# Altium PCB PCB3.PcbDoc
Units mil, origin at the board's own origin, x right, y up, seen from the top; angles counter-clockwise.
Board outline 1392 x 956 mil, 2 copper layers (Top Layer, Bottom Layer); 52 components, 58 nets, 232 pads, 145 vias.
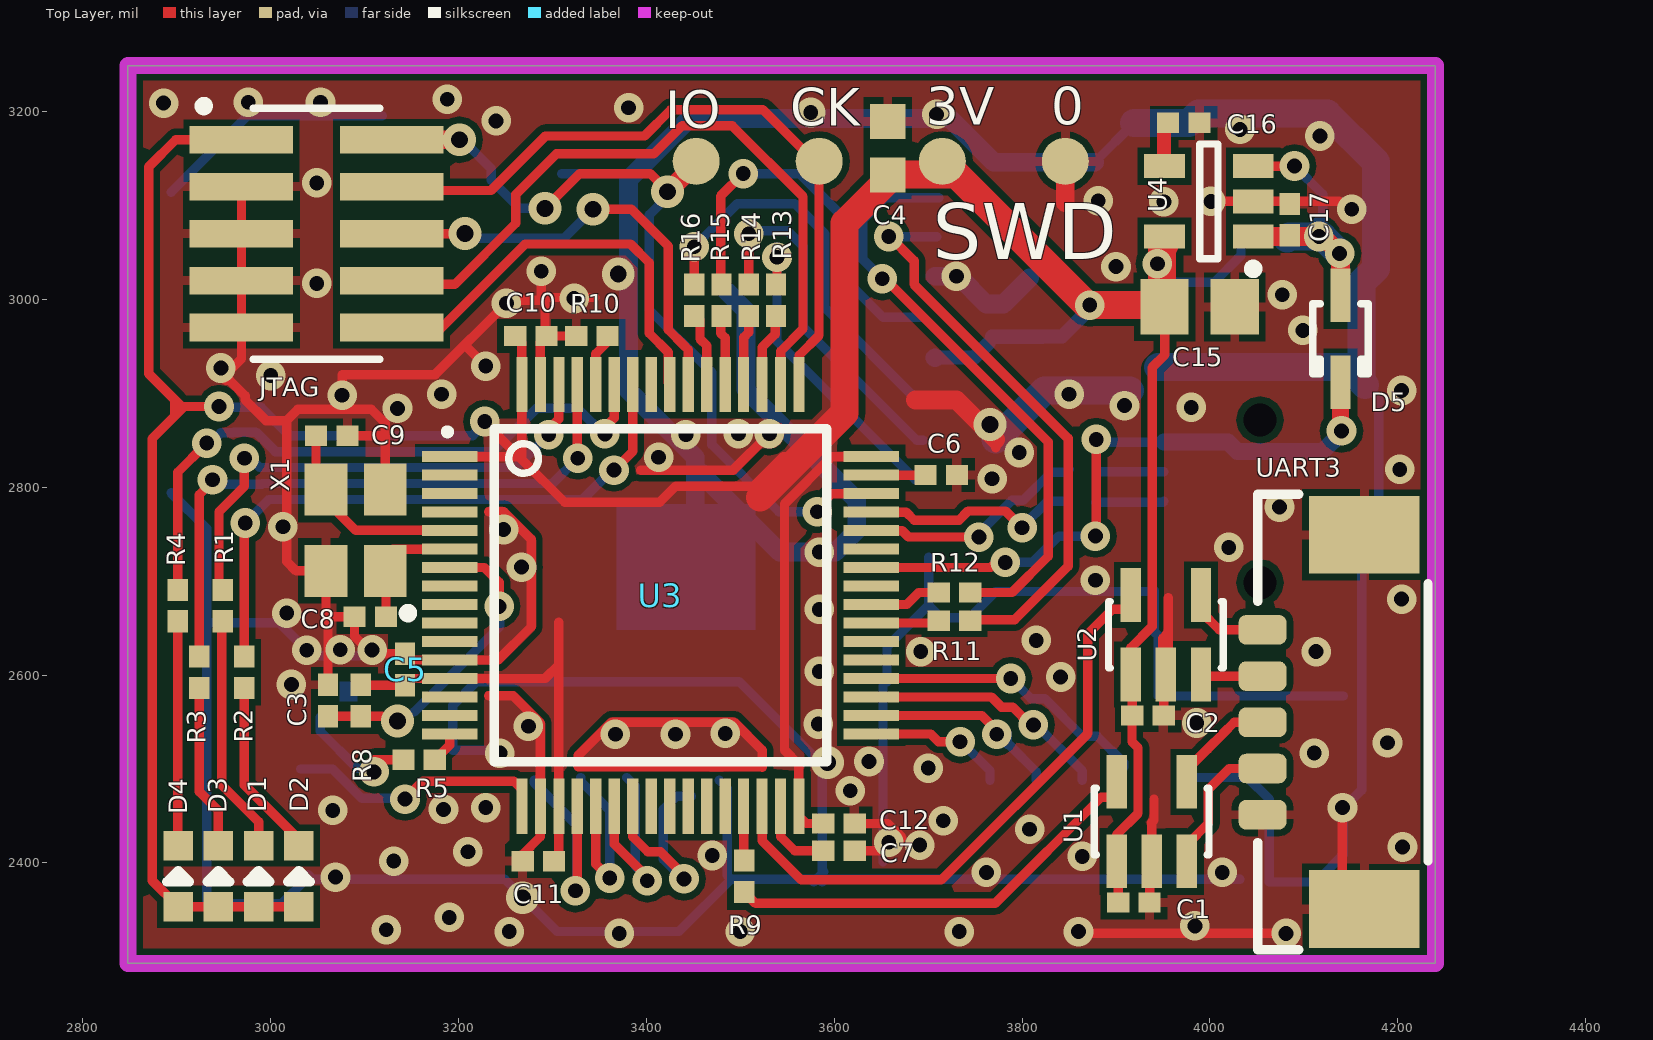
[diagram p0: Top Layer view]
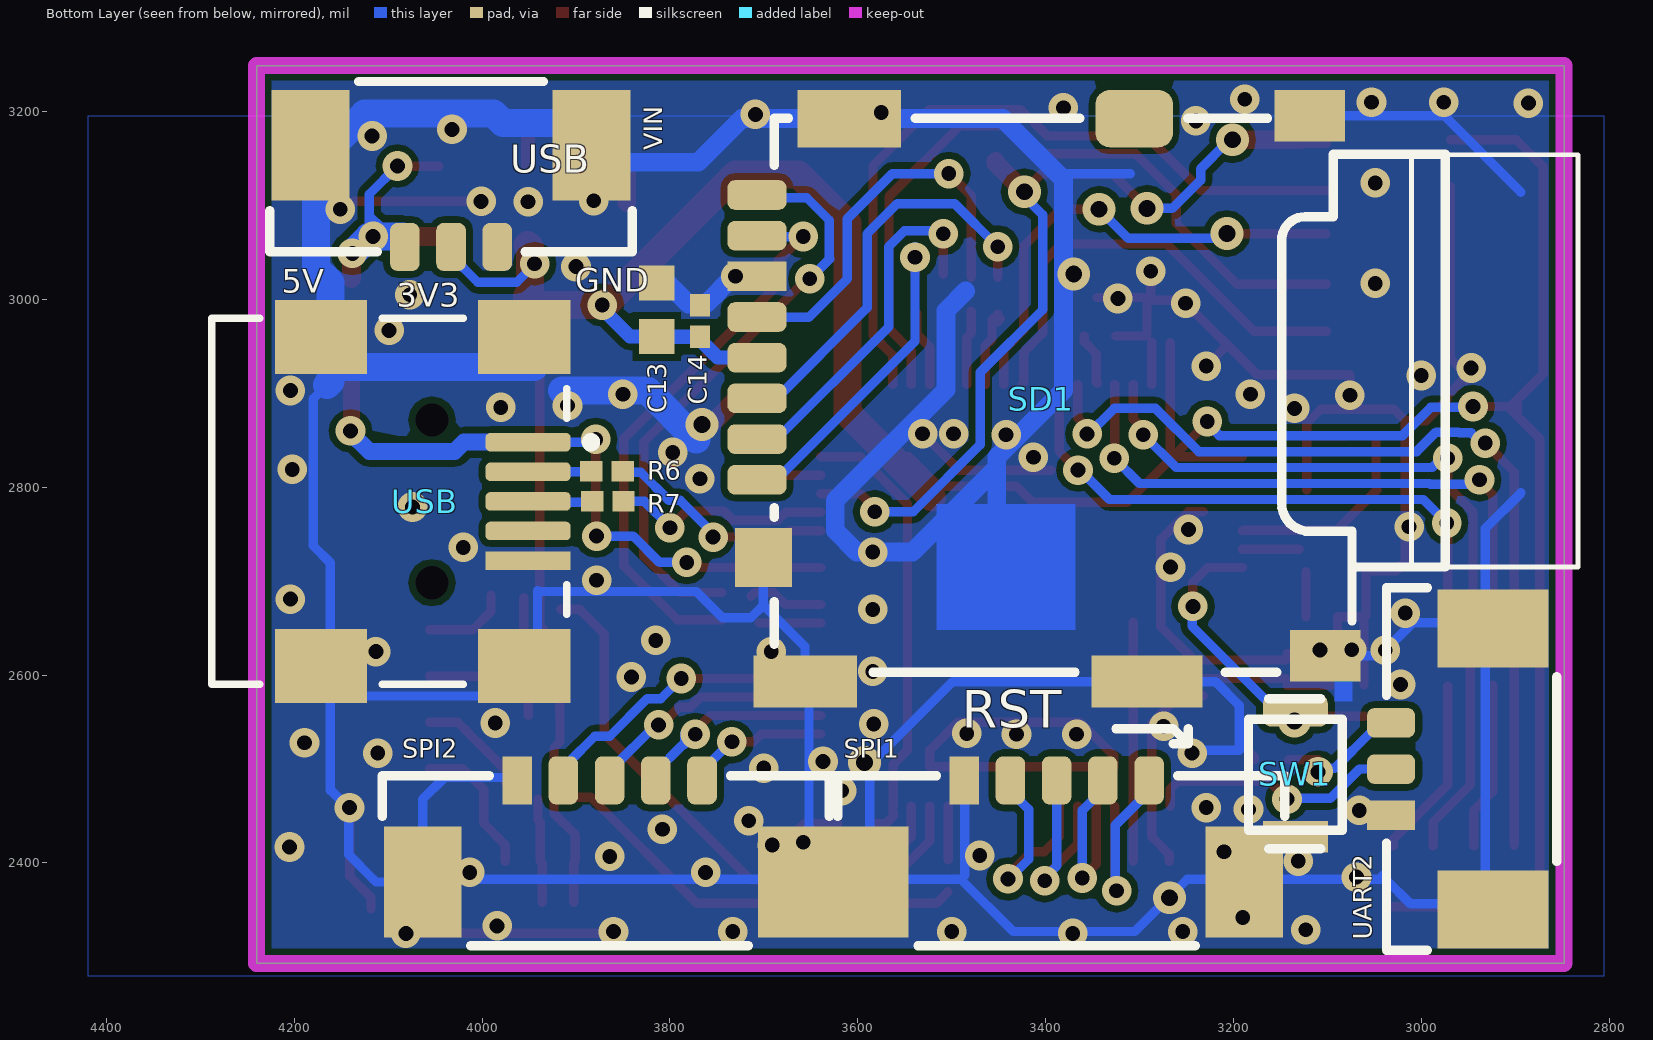
[diagram p1: Bottom Layer view, seen from below]

## Layer stack, top to bottom
Top Layer: signal copper 1.4
Dielectric: dielectric 12.6, FR-4, Dk 4.8
Bottom Layer: signal copper 1.4

## Board outline
2848,2293 4240,2293 4240,3249 2848,3249

## Design rules (kind name [scope] priority, off if disabled: settings)
Clearance [All] p1: gap=7
ComponentClearance [All] p1 off: gap=2 collisioncheckmode=3 verticalgap=10 showdistances=FALSE
DiffPairsRouting [All] p1: maxlimit=10 minlimit=10 mostfreqgap=10 maxuncoupledlength=500
MinimumSolderMaskSliver [All] p1 off: minsoldermaskwidth=10
PlaneConnect PlaneConnect_1 [IsVia] p1: planeconnectstyle=Direct reliefexpansion=20 reliefentries=4 reliefconductorwidth=10 reliefairgap=10
PlaneConnect [All] p2: planeconnectstyle=Relief reliefexpansion=20 reliefentries=4 reliefconductorwidth=10 reliefairgap=10
PolygonConnect PolygonConnect_1 [IsVia or IsNamedPolygon('CriticalGnd')] p1: connectstyle=Direct reliefconductorwidth=10 reliefentries=4 polygonreliefangle="90 Angle"
PolygonConnect [All] p2: connectstyle=Relief reliefconductorwidth=10 reliefentries=4 polygonreliefangle="90 Angle"
RoomDefinition Connectors [InComponentClass('Connectors')] p1: confinementstyle=ConfineIn formatcopy=TRUE lockcomponents=FALSE outline 2849,2293 4294,2293 4294,3249 2849,3249
RoomDefinition Power [InComponentClass('Power')] p2: confinementstyle=ConfineIn formatcopy=TRUE lockcomponents=FALSE outline 4124,3349 3916,3349 3916,2948 4124,2948
RoomDefinition LedsAndBtns [InComponentClass('LedsAndBtns')] p3: confinementstyle=ConfineIn formatcopy=TRUE lockcomponents=FALSE outline 3271,2740 3271,2322 2874,2322 2874,2740
RoomDefinition SD [InComponentClass('SD')] p4: confinementstyle=ConfineIn formatcopy=TRUE lockcomponents=FALSE outline 3852,2551 3852,3233 2818,3233 2818,2551
RoomDefinition MCU [InComponentClass('MCU')] p5: confinementstyle=ConfineIn formatcopy=TRUE lockcomponents=FALSE outline 3016,2336 4194,2336 4194,3302 3016,3302
RoutingVias [All] p1: holewidth=18 width=35 viastyle="Through Hole" minholewidth=15.75 minwidth=31.5 maxholewidth=28 maxwidth=50
SilkToSilkClearance [All] p1 off: silktosilkclearance=10
SilkscreenOverComponentPads [All] p1 off: minsilkscreentomaskgap=10
SolderMaskExpansion SolderMaskExpansion_1 [IsVia] p1: expansion=-78.74
SolderMaskExpansion [All] p2: expansion=4
TestPointUsage FabricationTestPointUsage [All] p1: valid=0 allowmultiple=FALSE
Testpoint FabricationTestpoint [(IsPad And (OnTopLayer Or OnBottomLayer))] p1: side=3 testpointundercomponent=TRUE minsize=40 maxsize=100 preferedsize=60 minholesize=0 maxholesize=40 preferedholesize=32 testpointgrid=1 style=297 order=0-112345678
Width [All] p1: maxlimit=30 minlimit=10 preferedwidth=10 minimp=50.000000 maximp=50.000000 favimp=50.000000
18 further rules are at their usual default settings.

## Classes and differential pairs
component class Power: C15 C16 C17 U4
net class SD_D[0..3]: SD_D0 SD_D1 SD_D2 SD_D3
component class SD: C13 C14 SD1
component class MCU: C3 C4 C5 C6 C7 C8 C9 C10 C11 C12 D5 R5 R6 R7 R8 R9 R10 R11 R12 R13 R14 R15 R16 U3 X1 Y1
component class LedsAndBtns: D1 D2 D3 D4 R1 R2 R3 R4 SW1
component class Connectors: C1 C2 JTAG SPI1 SPI2 U1 U2 UART2 UART3 USB VIN
differential pair LVDS_UART_OUT: +LVDS_UART_OUT_P -LVDS_UART_OUT_N
differential pair LVDS_UART_IN: +LVDS_UART_IN_P -LVDS_UART_IN_N
differential pair USB: +USB_P -USB_N

## Components (designator, comment, footprint, x,y, rotation, side; value= is the part's Value field where it differs from the comment)
C1 "Cap" V0402 3919,2358 r180 top
C2 "Cap" V0402 3934,2557 r180 top
C3 "Cap" V0402 3061,2573 r270 top
C4 "Cap" V0603 3657,3161 r90 top
C5 "Cap" V0402 3143,2606 r270 top
C6 "Cap" V0402 3714,2813 r180 top
C7 "Cap" V0402 3605,2413 r180 top
C8 "Cap" V0402 3106,2662 r0 top
C9 "Cap" V0402 3065,2855 r0 top
C10 "Cap" V0402 3277,2961 r180 top
C11 "Cap" V0402 3285,2402 r0 top
C12 "Cap" V0402 3605,2442 r180 top
C13 "Cap" V0603 3814,2989 r90 bottom
C14 "Cap" V0402 3768,2977 r90 bottom
C15 "TAJR475K006RNJ" 0805 3989,2992 r0 top
C16 "Cap" V0402 3972,3188 r0 top
C17 "Cap" V0402 4085,3085 r270 top
D1 "BLUE" KP-1608SURC_R 2987.17,2386 r90 top
D2 "RED" KP-1608SURC_B 3030,2386 r90 top
D3 "GREEN" KP-1608SURC_Y 2944.33,2386 r90 top
D4 "YELLOW" KP-1608SURC_G 2901.5,2386 r90 top
D5 "D Schottky" SOD-323 4139,2958 r270 top
JTAG "dual-row 10 pin connector" FTSH-105-01-L-DV-K-TR 3048.8,3070 r90 top
R1 "Res3" V0402RES 2949,2674 r270 top
R2 "Res3" V0402RES 2972,2603 r270 top
R3 "Res3" V0402RES 2924,2603 r270 top
R4 "Res3" V0402RES 2901,2674 r270 top
R5 "Res3" V0402RES 3158,2510 r180 top
R6 "Res3" V0402RES 3867,2817 r0 bottom
R7 "Res3" V0402RES 3866,2785 r0 bottom
R8 "Res3" V0402RES 3096,2573 r90 top
R9 "Res3" V0402RES 3504,2386 r270 top
R10 "Res3" V0402RES 3342,2961 r0 top
R11 "Place close to MCU" V0402RES 3728,2658 r180 top
R12 "Place close to MCU" V0402RES 3728,2688 r180 top
R13 "Place close to MCU" V0402RES 3538,2999 r270 top
R14 "Place close to MCU" V0402RES 3509,2999 r270 top
R15 "Place close to MCU" V0402RES 3480,2999 r270 top
R16 "Place close to MCU" V0402RES 3451,2999 r270 top
SD1 "SD Slot" MICROSD-card 3065,2934 r90 bottom
SPI1 "0533980571" "5 pins picoblade 1,25 mm pitch, right-angle SMT - duplicate"#1 3339,2489 r180 bottom
SPI2 "0533980571" "5 pins picoblade 1,25 mm pitch, right-angle SMT - duplicate"#1 3815,2489 r180 bottom
SW1 "Tactile OMRON B3U-1000P" TACTILE-B3U-1000P 3134,2495 r270 bottom
U1 "LVDS DRVR FIN1001M5X" SOT-23-5 3938,2444 r0 top
U2 "LVDS RECVR FIN1002M5X" SOT-23-5 3953,2643 r0 top
U3 "STM32F40x-RG_Dirk" LQFP64 3415,2685 r0 top
U4 "LP2992AIM5-3.3" MF05A_N 3998.76,3104.4 r180 top
UART2 "53398-0371" "3 pins picoblade 1,25 mm pitch, right-angle SMT"#1 2978,2500 r90 bottom
UART3 "0533980571" "5 pins picoblade 1,25 mm pitch, right-angle SMT - duplicate"#2 4055,2599 r90 top
USB "0481900001" USB/SM0.8-6H5 4260,2785 r0 bottom
VIN "53398-0371" "3 pins picoblade 1,25 mm pitch, right-angle SMT"#2 4033,3110 r0 bottom
X1 "3SMXB" CFPX-5 3090.38,2754.25 r90 top

## Footprints (in the part's own frame and the unit in brackets; to place one, negate y for a bottom-side part, rotate by r counter-clockwise, add the part's x,y. Pads: shape width x height; smd on the part's side, far side on the other; paste and mask are expansions set on the pad)
"3 pins picoblade 1,25 mm pitch, right-angle SMT"#1 [mm]
  rect 2.1x3 smd: 1(-3.8,-1.375) 1(3.8,-1.375)
  rect 0.8x1.3 smd: 1(-1.25,1.375)
  rrect50% 0.8x1.3 smd: 2(0,1.375) 3(1.25,1.375)
  silkscreen extent -4.9,-3.1 4.9,1.5, body extent -4.45,-2.6 4.45,1.6, height 4.69
"3 pins picoblade 1,25 mm pitch, right-angle SMT"#2 [mm]
  rect 2.1x3 smd: 1(-3.8,-1.375) 1(3.8,-1.375)
  rrect50% 0.8x1.3 smd: 1(-1.25,1.375) 2(0,1.375) 3(1.25,1.375)
  silkscreen extent -4.9,-3.1 4.9,1.5, body extent -4.45,-2.6 4.45,1.6, height 4.69
"5 pins picoblade 1,25 mm pitch, right-angle SMT - duplicate"#1 [mm]
  rect 2.1x3 smd: 1(-6.3,-2.775) 1(3.82,-2.775)
  rect 0.8x1.3 smd: 1(-3.75,-0.025)
  rrect50% 0.8x1.3 smd: 2(-2.5,-0.025) 3(-1.25,-0.025) 4(0,-0.025) 5(1.25,-0.025)
  silkscreen extent -7.4,-4.5 4.92,0.1, body extent -6.95,-4.35 4.45,-0.15, height 4.69
"5 pins picoblade 1,25 mm pitch, right-angle SMT - duplicate"#2 [mm]
  rect 2.1x3 smd: 1(-6.3,-2.775) 1(3.82,-2.775)
  rrect50% 0.8x1.3 smd: 1(-3.75,-0.025) 2(-2.5,-0.025) 3(-1.25,-0.025) 4(0,-0.025) 5(1.25,-0.025)
  silkscreen extent -7.4,-4.5 4.92,0.1, body extent -6.95,-4.35 4.45,-0.15, height 4.69
0805 [mm] "Chip Capacitor; Body 2.0 x 1.2 mm (LxW typ)"
  rect 1.3x1.5 smd: 1(-0.95,0) 2(0.95,0)
  body extent -1.3,-0.66 1.32,0.66, height 0.8
CFPX-5 [mm] "Quartz Crystal, SM; Body 3.4 x 2.7 mm (LxW max)"
  rect 1.4x1.15 smd: 1(-1.1,-0.8) 2(1.1,-0.8) 3(1.1,0.8) 4(-1.1,0.8)
  silkscreen extent -2.37,-1.54 -2.12,-1.29, body extent -1.9,-1.48 1.9,1.48, height 1
FTSH-105-01-L-DV-K-TR [mm] "1.27mm pitch, 10 pin, terminal strip; keyed"
  rect 0.75x2.8 smd mask+0: 1(2.54,2.03) 2(2.54,-2.03) 3(1.27,2.03) 4(1.27,-2.03) 5(0,2.03) 6(0,-2.03) 7(-1.27,2.03) 8(-1.27,-2.03) 9(-2.54,2.03) 10(-2.54,-2.03)
  silkscreen extent -3.39,-1.72 3.57,3.17, body extent -3.17,-3.17 3.18,2.67, height 6.08
KP-1608SURC_B [mm]
  rect 0.8x0.8 smd: 1(-0.825,0) 2(0.825,0)
  silkscreen extent -0.15,-0.3 0.15,0.3, body extent -0.81,-0.41 0.79,0.38, height 1
KP-1608SURC_G [mm]
  rect 0.8x0.8 smd: 1(-0.825,0) 2(0.825,0)
  silkscreen extent -0.15,-0.3 0.15,0.3, body extent -0.81,-0.41 0.79,0.38, height 1
KP-1608SURC_R [mm]
  rect 0.8x0.8 smd: 1(-0.825,0) 2(0.825,0)
  silkscreen extent -0.15,-0.3 0.15,0.3, body extent -0.81,-0.41 0.79,0.38, height 1
KP-1608SURC_Y [mm]
  rect 0.8x0.8 smd: 1(-0.825,0) 2(0.825,0)
  silkscreen extent -0.15,-0.3 0.15,0.3, body extent -0.81,-0.41 0.79,0.38, height 1
LQFP64 [mm]
  rect 1.5x0.3 smd: 1(-5.7,3.75) 2(-5.7,3.25) 3(-5.7,2.75) 4(-5.7,2.25) 5(-5.7,1.75) 6(-5.7,1.25) 7(-5.7,0.75) 8(-5.7,0.25) 9(-5.7,-0.25) 10(-5.7,-0.75) 11(-5.7,-1.25) 12(-5.7,-1.75) 13(-5.7,-2.25) 14(-5.7,-2.75) 15(-5.7,-3.25) 16(-5.7,-3.75) 33(5.7,-3.75) 34(5.7,-3.25) 35(5.7,-2.75) 36(5.7,-2.25) 37(5.7,-1.75) 38(5.7,-1.25) 39(5.7,-0.75) 40(5.7,-0.25) 41(5.7,0.25) 42(5.7,0.75) 43(5.7,1.25) 44(5.7,1.75) 45(5.7,2.25) 46(5.7,2.75) 47(5.7,3.25) 48(5.7,3.75)
  rect 0.3x1.5 smd: 17(-3.75,-5.7) 18(-3.25,-5.7) 19(-2.75,-5.7) 20(-2.25,-5.7) 21(-1.75,-5.7) 22(-1.25,-5.7) 23(-0.75,-5.7) 24(-0.25,-5.7) 25(0.25,-5.7) 26(0.75,-5.7) 27(1.25,-5.7) 28(1.75,-5.7) 29(2.25,-5.7) 30(2.75,-5.7) 31(3.25,-5.7) 32(3.75,-5.7) 49(3.75,5.7) 50(3.25,5.7) 51(2.75,5.7) 52(2.25,5.7) 53(1.75,5.7) 54(1.25,5.7) 55(0.75,5.7) 56(0.25,5.7) 57(-0.25,5.7) 58(-0.75,5.7) 59(-1.25,5.7) 60(-1.75,5.7) 61(-2.25,5.7) 62(-2.75,5.7) 63(-3.25,5.7) 64(-3.75,5.7)
  silkscreen extent -5.84,-4.5 4.5,4.5, body extent -4.5,-4.5 4.5,4.5, height 2.54
MF05A_N [mm] "SOT23, 5-Leads, Body 2.9x1.6mm, Pitch 0.95mm, Lead Span 2.8mm, IPC Medium Density"
  rect 1.1x0.65 smd: 1(-1.2,0.95) 2(-1.2,0) 3(-1.2,-0.95) 4(1.2,-0.95) 5(1.2,0.95)
  silkscreen extent -1.33,-1.55 0.25,1.95, body extent -0.9,-1.55 0.9,1.55, height 1.19
MICROSD-card [mm]
  rrect50% 1.55x2.1 smd: CD(6.566,6.114)
  rrect50% 0.8x1.6 smd: CD/DAT3(-2.099,16.314) CLK(1.201,16.314) CMD(-0.999,16.314) DAT0(3.401,16.314) DAT1(4.501,16.314) DAT2(-3.199,16.314) VCC(0.101,16.314)
  rect 1.6x1.55 smd: GND(-5.299,16.139)
  rect 0.8x1.6 smd: GND(2.301,16.314)
  rect 1.4x3 smd: HOUSING(-8.659,5.764)
  rect 1.4x2.8 smd: HOUSING(-8.659,15.014)
  rect 1.4x1.9 smd: HOUSING(-7.959,0.95) HOUSING(6.641,1.364)
  rect 1.55x2.8 smd: HOUSING(6.566,13.814)
  silkscreen extent -8.41,-5.89 6.58,15.84, body extent -8.41,-2.29 6.58,15.84, height 1.95
SOD-323 [mm] "SOD-323/SC-76; 2 Leads; Body 1.7 x 1.3 mm, (LxW)"
  rect 1.45x0.55 smd: 1(1.175,0) 2(-1.175,0)
  silkscreen extent -0.95,-0.75 0.95,0.75, body extent -1.05,-0.85 1.05,0.85, height 1.1
SOT-23-5 [mm] "SOT-23/SC-74A; 5 Leads; Body 3 x 3.1 mm, inc. leads (LxW max)"
  rect 0.55x1.45 smd: 1(-0.95,-1.075) 2(0,-1.075) 3(0.95,-1.075) 4(0.95,1.075) 5(-0.95,1.075)
  silkscreen extent -1.55,-0.9 1.55,0.9, body extent -1.65,-1 1.65,1, height 1.45
TACTILE-B3U-1000P [mm]
  rrect50% 0.85x1.75 smd paste+0.1: 1(-1.7,0)
  rect 0.85x1.75 smd paste+0.1: 2(1.7,0)
  silkscreen extent -2.03,-1.27 2.03,1.27, body extent -2,-1.27 2,1.23, height 1.6
USB/SM0.8-6H5 [mm] "Connector; USB2.0, Type B, SM; 5 Position; Right Angle"
  rrect50% 2.3x0.5 smd: 1(-7.85,-1.6) 2(-7.85,-0.8) 3(-7.85,0) 4(-7.85,0.8)
  rect 2.3x0.5 smd: 5(-7.85,1.6)
  round 0.6 hole 0.9 unplated: MH1(-5.25,2.2) MH2(-5.25,-2.2)
  rect 2.5x2 smd: MH3(-7.75,-4.45) MH3(-2.25,-4.45) MH4(-7.75,4.45) MH4(-2.25,4.45)
  silkscreen extent -9.67,-4.95 0.7,4.95
V0402 [mm] "Chip Capacitor; Body 1.0 x 0.5 mm (LxW typ)"
  rect 0.6x0.55 smd: 1(-0.425,0) 2(0.425,0)
  body extent -0.5,-0.25 0.5,0.25, height 0.5
V0402RES [mm] "Chip Capacitor; Body 1.0 x 0.5 mm (LxW typ)"
  rect 0.6x0.55 smd: 1(-0.425,0) 2(0.425,0)
  body extent -0.5,-0.25 0.5,0.25, height 0.25
V0603 [mm] "Chip Capacitor; Body 1.6 x 0.8 mm (LxW typ)"
  rect 0.95x0.95 smd: 1(-0.725,0) 2(0.725,0)
  body extent -0.8,-0.4 0.8,0.4, height 0.7

## Part data
C1 C2 C3 C4 C5 C6 C7 C8 C9 C10 C11 C12 C13 C14 C16 C17: "Capacitor"
C15: library part "Cap Pol3", "Polarized Capacitor (Surface Mount)"
D1 D2 D3 D4: library part LED2, "Typical RED, GREEN, YELLOW, AMBER GaAs LED"
D5: "Schottky Diode"
R1 R2 R3 R4 R5 R6 R7 R8 R9 R10: "Resistor"
R11 R12 R13 R14 R15 R16: library part Res3, "Resistor"
SPI1 SPI2 UART3: "Molex picoblade 5 pins"
U4: "Micropower 250 mA Low-Noise Ultra Low-Dropout Regulator, 5-pin SOT-23"
UART2 VIN: "PICOBLADE, 1,25 mm pitch, header, SMD"
USB: "USB On-The-Go (OTG) Mini-B Receptacle, Right Angle, SMT, 0.80mm (.031\") Pitch, Solder Tabs with Back Cover, Recessed Type"
X1: "Surface Mount Quartz Crystal"

## Free pads (board coordinates)
  round 50 smd: 0(3453,3147) 1(3584,3147) 2(3715,3147) 3(3846,3147)

## Via types
v1: diameter 31.5, hole 15.75, Top Layer to Bottom Layer, 116 vias
v2: diameter 31.5, hole 15.75, Top Layer to Bottom Layer, tented both sides, 19 vias
v3: diameter 35, hole 18, Top Layer to Bottom Layer, 10 vias

## Nets (pads, with @x,y where several pads share a name; then routed paths per layer and width w, separated by ;. In a path a pad name is that pad's centre, name@x,y a point inside that pad or via, vN(x,y) a via of type N, cw(c..) or ccw(c..) an arc to the next point about the centre after c; other vN are vias at no path point)
+3.3V: C1.2 C2.2 C4.1 C5.2 C10.2 C11.2 C12.2 C13.1 C14.1 C15.1 D1.1 D2.1 D3.1 D4.1 JTAG.1 pad.2 R8.2 SD1.VCC U1.1 U2.1 U3.1 U3.13 U3.19 U3.32 U3.48 U3.64 U4.5 VIN.2 | length 4741.7
  Top Layer w10: 2898,2876 2898,2893 ; 2924,2886 2908,2886 2873.75,2851.75 2873.75,2381.27 D4.1 D2.1 ; v1(2945,2886) 2905,2886 2898,2893 ; JTAG.1 2899,3170 2870,3141 2870,2921 2898,2893 ; R8.2@3096,2589.27 C5.2 ; C5.2@3145,2596.42 U3.13 3292.15,2596.42 3306.73,2611 ; U3.1 3264.36,2832.64 ; v1@3225.57,2871.43 3267.36,2829.64 ; C10.2@3267.36,2953.91 U3.64 3267.36,2829.64 ; C11.2@3306.73,2402 U3.19 3306.73,2611 ; 3306.73,2656.27 3306.73,2611 ; 3551,2832.64 3545.88,2832.64 3514.53,2801.29 3431.29,2801.29 3414,2784 3313,2784 3267.36,2829.64 ; U3.32@3562.64,2456.36 3562,2455.72 3562,2450 3570,2442 C12.2@3581.23,2442 ; U3.32 3562,2461.23 3562,2505.16 3547,2520.16 3547,2782.24 3597.4,2832.64 U3.48 ; U1.1 3900.6,2429.98 3923.43,2452.81 3923.43,2522.57 3917,2529 3917,2556.73 C2.2 U2.1@3917.27,2599.01 ; C1.2 U1.1@3902.27,2400.01 ; U2.1 3915.6,2628.98 3938.43,2651.81 3938.43,2927.43 3952,2941 C15.1@3952,3003.02
  Top Layer w30: 3521,2789 3611,2879 3611,3081 3663,3133 3730,3133 3869,2994 C15.1@3942,2994 ; U4.5@3951.51,3058 3949,3055.49 3949,3006.02 C15.1@3952,3003.02
  Bottom Layer w10: v1@2937,2885 2990,2885 3020,2855 3215,2855 v1@3228,2868 ; v1(3944,3038) 3944,3037.34 3963.07,3018.28 4004.51,3018.28 4033,3046.77 VIN.2
  Bottom Layer w15: SD1.VCC 3749,2938 C14.1@3764,2953 ; C14.1 C13.1@3821.27,2960.27 ; C13.1 3842.46,2960.46 v1@3874,2992
  Bottom Layer w20: SD1.VCC SD1.VCC
  other v1: 3228,2870 3872,2994
BOOT: R10.2 U3.60 | length 56.2
  Top Layer w10: U3.60@3345,2910.51 3346,2911.51 3346,2942.12 3358.73,2954.86 R10.2
GND: C1.1 C2.1 C3.1 C4.2 C5.1 C6.1 C7.1 C8.1 C9.2 C10.1 C11.1 C12.1 C13.2 C14.2 C15.2 C16.2 C17.1 JTAG.3 JTAG.5 JTAG.7 JTAG.9 pad.3 R10.1 SD1.GND SD1.HOUSING SPI1.1 SPI2.1 SW1.2 U1.2 U2.2 U3.12 U3.18 U3.63 U4.2 UART2.1 UART3.1 USB.5 USB.MH3 USB.MH4 VIN.1 X1.2 X1.4 | length 10822.6
  Top Layer w10: JTAG.3 2968.88,2936.88 2949,2917 2952.25,2913.75 2956.49,2913.75 2972.75,2897.49 2972.75,2893.25 2995,2871 3017,2871 ; 3058.89,2663.11 X1.4 3027.06,2710.94 3017,2721 3017,2871 ; 3060,2662 C8.1 3089.27,2641.46 3108,2622.73 C5.1 ; C3.1 3061,2661 ; v1@3076,2885 3076,2920 3175,2920 3254,2999 3292,2999 ; C9.2 3121.88,2855 ; X1.2 3121.88,2868.12 3107,2883 3029,2883 3017,2871 ; C5.1@3144.21,2616.1 U3.12 3242.1,2616.1 3277.46,2651.46 3277.46,2744.54 3248,2774 3232.12,2774 ; 3207.8,2950.2 v1(3229,2929) ; 3232.12,2578 3258,2578 3287.05,2548.95 U3.18 3287.05,2427.87 3268.27,2409.09 C11.1 ; U3.63 C10.1@3287.05,2954.32 ; 3288,3003 v1(3288,3030) ; C10.1@3292,2962.73 3292,2999 ; C10.1 R10.1 ; 3345,3002 3295,3002 3292,2999 ; 3394,2818.29 3492.29,2818.29 v1(3531,2857) ; 3522.77,2502.62 3327.5,2502.62 3327.5,2514.5 3363,2550 3493.12,2550 3523.27,2519.85 3523.27,2502.12 ; C7.1 3658,2413 3672,2427 3657,2442 C12.1 ; 3772,2842.27 v3@3772,2851 ; v1@3869.73,2325 v1@4092.28,2325 ; C1.1 U1.2@3935.73,2399.41 ; U1.2 3938,2443.34 3940.43,2445.77 3940.43,2468 ; C2.1 U2.2@3950.73,2598.41 ; 3955.43,2682.43 3955.43,2646 ; v1@3992.4,3104.4 U4.2 4137.6,3104.4 ; UART3.1@4118.25,2350.97 4118.25,2363.25 4140.92,2385.92 v1@4140.92,2462.79 ; 3955.43,2646 3955.43,2603.1 U2.2 3949.86,2603.82 3949.86,2639.2 3955.43,2644.77 3955.43,2646
  Top Layer w20: 3686.54,2893 3730,2893 v3@3772,2851 ; 3846,3103 pad.3
  Bottom Layer w10: 2894,2794 2931.87,2756.13 UART2.1@2931.87,2655.61 ; 2894,3114 2975.44,3195.44 SD1.HOUSING@3118.71,3195.44 ; 3040.13,2387.36 3044.75,2382.75 ; SD1.HOUSING@3102.4,2620.64 3044.36,2620.64 3009.39,2655.61 UART2.1@2931.87,2655.61 ; SPI1.1@3203.25,2382.75 SPI1.1@3212.75,2382.75 ; v1@3230.93,2520 3194,2520 3194,2568 3219.08,2593.08 3291.94,2593.08 3498.92,2593.08 v3@3589,2503 ; 3310,3134 3387,3134 ; v3@3371,3025 v3@3386,3025 ; SPI1.1@3477.64,2488.02 3486,2479.65 3486,2387 3490.25,2382.75 ; SPI1.1@3578.03,2379.75 SPI1.1@3589,2390.72 ; SPI1.1@3587.03,2379.75 v3@3587.03,2501.03 ; SPI2.1@3651.93,2401.07 SD1.HOUSING@3651.93,2588.9 ; SD1.HOUSING@3656.11,2593.08 3656.11,2630.11 3700.4,2674.4 ; SD1.GND@3700.4,2725.36 3700.4,2674.4 ; VIN.1@3877.39,3146.13 VIN.1@3919.22,3187.96 ; SPI2.1@3974.64,2491.02 4007.48,2491.02 4039.98,2491.02 4063.03,2467.97 4063.03,2379.75 4112.75,2379.75 ; SPI2.1@4032.03,2382.75 3633.61,2382.75 3541.03,2382.75 3490.25,2382.75 ; 4115.75,2382.75 4142,2409 4142,2458.13 4161.42,2477.55 4161.42,2577.8 4161.42,2719.42 4179.75,2737.75 4179.75,2894.25 4165,2909 ; USB.MH4@4142,2577.8 3944.88,2577.8 3944.88,2642.12 3940.94,2646.06 3940.94,2690.01 3939.94,2689 3772,2689 3744,2661 3713.8,2661 3700.4,2674.4 ; UART2.1@2931.87,2655.61 2931.87,2356.39 3011.39,2356.39 3037.75,2382.75 3044.75,2382.75 ; 3044.75,2382.75 3249.25,2382.75 3305,2327 3434.5,2327 3490.25,2382.75
  Bottom Layer w20: 3452,2762 3452,2821 ; 3485,3009 3506,2988 3506,2904 3624,2786 3624,2754 3601,2731 3542,2731 3452,2821 ; SD1.GND@3707.29,3024.57 3732.43,3024.57 3762,2995 3780,2995 C13.2@3808,3023 ; VIN.1@3877.39,3146.13 3769.87,3146.13 3723.51,3192.49 3608.87,3192.49 3445.49,3192.49 3387,3134 3381,3128 3381,2902.89 3452,2831.89 3452,2821
  Bottom Layer w30: v3@3772,2851 3824,2903 3915,2903 ; VIN.1@3919.22,3187.96 3977.79,3187.96 3987.79,3197.96 4124.78,3197.96 4176.61,3146.13 4176.61,3033 4161.42,3017.81 4161.42,2912.58 4165,2909 ; USB.MH3@3944.88,2928.2 USB.MH3@4161.42,2928.2
  other v1: 3371,2325 4081,2325 3254,2327 3500,2327 3733,2327 3860,2327 3123,2329 3984,2333 3190,2342 3069,2385 3762,2390 4013,2390 3131,2402 3864,2407 3470,2408 3210,2412 4205,2417 3691,2419 3658,2422 3808,2436 3716,2445 3066,2456 3184,2457 3229,2459 4141.13,2459 3617,2477 3700,2501 3637,2508 3244,2517 4111,2517 4189,2528 3367,2537 3431,2537 3484,2538 3274.42,2545.58 3583,2548 3986,2549 3022,2590 3841,2598 3584,2604 3692,2625 4113,2625 3038.41,2626.59 3074,2627 3108,2626.73 3815,2637 3017,2666 3584,2670 4204,2681 3878,2701 3267,2715 3584,2731 4020,2736 3248,2755 3013,2758 4074,2779 3768,2809 4202,2819 3413,2832 3797,2837 3442,2856 3498,2857 3135,2884 3980,2885 3909,2887 3076,2898 3182,2899 3850,2899 4204,2903 3000,2919 2947,2927 4099,2967 3251,2996 3323,3001 4077,3005 3049,3017 3730,3024.57 3900,3035 4151,3096 3951,3104 4001,3104.4 3881,3105 3049,3124 4117,3174 4032,3181 3240,3190 3709,3197 3575,3199 3381,3204 2886,3209 2976,3210 3053,3210 3188,3213
  other v3: 3268,2363 3593,2507 3766,2867 3370,3027
JTAG_RST: JTAG.10 U3.56 | length 487.5
  Top Layer w10: JTAG.10@3100.92,2966 3178,2966 3271,3059 3383,3059 3403,3039 3403,2963.97 3423.06,2943.91 3423.06,2911.19 U3.56
JTAG_TCK: JTAG.4 pad.1 U3.49 | length 784.8
  Top Layer w10: JTAG.4@3100.92,3116 3234.5,3116 3292.5,3174 3398,3174 3426,3202 3524,3202 3583.75,3142.25 3583.75,2961.66 3562.64,2940.55 U3.49
JTAG_TDI: JTAG.8 U3.50 | length 795.1
  Top Layer w10: JTAG.8@3100.92,3016 3196,3016 3261,3081 3261,3111.75 3304.25,3155 3408,3155 3438,3185 3491.24,3185 3566.75,3109.49 3566.75,2968.71 3542.95,2944.91 U3.50
JTAG_TDO: JTAG.6 U3.55 | length 509.4
  Top Layer w10: JTAG.6@3101.92,3070 v3@3199,3070 ; v3(3343,3096) 3384,3096 3423.25,3056.75 3423.25,2967.76 3440.06,2950.95 3444.53,2946.47 U3.55
  Bottom Layer w10: v3@3199,3065 3312,3065 v3(3343,3096) ; v3@3352,3094 v3@3354,3096
  other v3: 3207,3070
JTAG_TMS: JTAG.2 pad.0 U3.46 | length 991.7
  Top Layer w10: JTAG.2@3100.92,3166 JTAG.2@3149,3166 ; JTAG.2 v3(3201,3170) ; v3(3292,3097) 3329,3134 3404,3134 v3@3411,3127 ; v1@3585,2781 3597.27,2793.27 U3.46
  Top Layer w20: JTAG.2 v3@3195,3170 ; v3@3422.58,3116.58 v3(3422.58,3114.58) 3453,3145 pad.0
  Bottom Layer w10: v3@3206.5,3167.5 3235,3139 3235,3126.96 3264.96,3097 v3(3292,3097) ; v3@3421,3108 3403,3090 3403,2989 3469.75,2922.25 3469.75,2845.25 3541,2774 v1(3582,2774)
L1: D1.2 R1.2 | length 252
  Top Layer w10: R1.2@2948,2654.27 2948,2482.96 2987.17,2443.79 D1.2
L2: D2.2 R2.2 | length 193.8
  Top Layer w10: R2.2@2972,2588.27 2972,2483 3030,2425 D2.2
L3: D3.2 R3.2 | length 179.2
  Top Layer w10: R3.2@2924,2589.27 2924,2476 2944.33,2455.67 D3.2
L5: D4.2 R4.2 | length 236.3
  Top Layer w10: D4.2@2901,2418.98 R4.2@2901,2655.27
LED_IN_BUF: R3.1 U3.61 | length 674.3
  Top Layer w10: R3.1@2924,2622.73 2924,2718 2924,2792 2938,2806 v1@2939,2806 ; v1@3326.42,2831.58 U3.61
  Bottom Layer w10: v1(3327,2831) 3300,2804 2990.96,2804 2990.21,2803.25 2944.75,2803.25 v1@2939,2809 ; v1@2939,2809 2939,2811.24 v1@2939,2809
  other v1: 2938,2808
LED_SD_ERR: R2.1 U3.58 | length 660.4
  Top Layer w10: R2.1@2972,2621.73 v1@2972,2762 ; v1@3363,2816 3363.24,2816 3385.47,2838.23 U3.58
  Bottom Layer w10: v1@2974,2761 v1(2973,2762) 2998,2787 3332,2787 3363.29,2818.29 v1(3365.5,2818.29)
LED_SD_READY: R1.1 U3.62 | length 553.5
  Top Layer w10: R1.1@2948,2687.73 2945,2690.73 2945,2774 2972,2801 v1(2972,2831) ; v1@3299,2865 3306.73,2872.73 U3.62
  Bottom Layer w10: v1@2968.51,2840.75 2988.25,2821 3261,2821 v1(3296,2856)
LED_SD_WR: R4.1 U3.59 | length 692.1
  Top Layer w10: R4.1@2901,2688.73 2901,2816 v1@2930,2845 ; v1@3358,2866 3365.79,2873.79 U3.59
  Bottom Layer w10: v1@2932,2843 2947,2858 2959.76,2858 2960.51,2858.75 2984.25,2858.75 3005,2838 3237,2838 3283,2884 3327,2884 3356,2855 v1@3363,2855
  other v1: 2932,2847 3355.79,2856.79
LVDS_UART_IN_N: U2.4 UART3.5 | length 91.3
  Top Layer w10: U2.4 3990.4,2667.61 4009.8,2648.21 UART3.5
LVDS_UART_IN_P: U2.3 UART3.4 | length 63.9
  Top Layer w10: U2.3@3992.08,2599 UART3.4
LVDS_UART_OUT_N: U1.3 UART3.2 | length 153
  Top Layer w10: U1.3 3975.4,2419.39 3998.23,2442.22 3998.23,2478.23 4020.57,2500.57 UART3.2
LVDS_UART_OUT_P: U1.4 UART3.3 | length 125.9
  Top Layer w10: U1.4 3975.4,2499.4 3997.25,2521.25 3997.49,2521.25 4013.75,2537.51 4013.75,2537.75 4025.79,2549.79 UART3.3 UART3.3@4044.79,2549.79
NetC16_1: C16.1 U4.4 | length 44
  Top Layer w15: U4.4@3951.27,3142.05 C16.1@3951.27,3186
NetD5_1: D5.1 U3.42 USB.1 | length 684.1
  Top Layer w10: U3.42 3750.53,2714.53 ; 3734,2714.53 3766.53,2714.53 3775,2723 v2@3775.19,2723 ; v1@3879,2749 v1(3879,2851)
  Top Layer w18: v1@4139,2869 D5.1@4139,2915.74
  Bottom Layer w10: v2(3782,2720) 3811,2720 3839,2748 v1(3878,2748) ; v1@3882.01,2847.99 USB.1
  Bottom Layer w18: USB.1 4019.15,2847.99 4029.25,2837.9 4119.9,2837.9 v1@4141,2859
  other v1: 4140,2860
NetR15_1: R15.1 SD1.CLK | length 411.6
  Top Layer w10: R15.1@3479,3023.73 3479,3110 v2(3503,3134)
  Bottom Layer w10: v2(3503,3134) 3563,3134 3611,3086 3611,3022 3652,2981 SD1.CLK@3693.56,2981
NetR16_1: R16.1 SD1.CMD | length 428.1
  Top Layer w10: R16.1@3451,3023.68 v2(3451,3056)
  Bottom Layer w10: v2(3451,3056) 3497,3102 3558,3102 3590,3070 3590,2991.04 3688.04,2893 SD1.CMD@3694.95,2893
NetR16_2: R16.2 U3.54 | length 84.6
  Top Layer w10: R16.2@3448,2979.31 R16.2@3451,2976.32 ; R16.2@3451,2984.32 3457.06,2978.25 3457.06,2957.98 3464.21,2950.83 U3.54
NRST: C3.2 R8.1 SW1.1 U3.7 | length 304.3
  Top Layer w10: C3.2 3118.73,2556.27 v3@3126,2549 ; U3.7 3227.47,2714.53 3243.13,2698.87 v1(3243.13,2673.17)
  Bottom Layer w10: SW1.1@3153,2561 3244,2652 3244,2672.3 v1@3242.15,2674.15
  other v3: 3135,2551
OSC_IN: C9.1 U3.5 X1.3 | length 213.9
  Top Layer w10: X1.3@3047.5,2797.13 3090.38,2754.25 3190.24,2754.25 U3.5 ; X1.3@3048.27,2802.07 C9.1
OSC_OUT: C8.2 U3.6 X1.1 | length 108.7
  Top Layer w10: C8.2 X1.1@3122.73,2710.09 ; X1.1@3130.02,2734.21 U3.6
SD0: R11.2 U3.39 | length 65.4
  Top Layer w10: U3.39 R11.2@3704.84,2655.47
SD1: R12.2 U3.40 | length 80.9
  Top Layer w10: U3.40 3677.16,2675.16 3690,2688 3709.31,2688 R12.2@3713.31,2684
SD2: R13.2 U3.51 | length 84.4
  Top Layer w10: U3.51 3523.27,2949.27 3537,2963 R13.2@3537,2985.31 ; R13.2@3537,2977.31 R13.2@3539,2979.31
SD3: R14.2 U3.52 | length 80.1
  Top Layer w10: U3.52 3503.58,2959.58 3509,2965 R14.2@3509,2987.31
SD_D0: R11.1 SD1.DAT0 | length 620.1
  Top Layer w10: v2@3652.88,3066.88 3659.12,3066.88 3685,3041 3685,3016 3849,2852 3849,2716 3792,2659 R11.1@3744.73,2659
  Bottom Layer w10: v2@3652.88,3066.88 SD1.DAT0@3709.29,3066.88
  other v2: 3658,3067
SD_D1: R12.1 SD1.DAT1 | length 631.1
  Top Layer w10: v2@3651.5,3022.5 3653.5,3022.5 3827.75,2848.25 3827.75,2726.51 3789.24,2688 R12.1
  Bottom Layer w10: v2(3651,3022) 3630,3043 3630.25,3043.25 3630.25,3084.25 3654.19,3108.19 SD1.DAT1@3711.29,3108.19
SD_D2: R13.1 SD1.DAT2 | length 344.3
  Top Layer w10: R13.1@3539,3026.68 v2@3539,3055
  Bottom Layer w10: v2@3539,3056 3539,2955.42 3686.42,2808 SD1.DAT2@3693.33,2808
  other v2: 3539,3045
SD_D3: R14.1 SD1.CD/DAT3 | length 377.4
  Top Layer w10: R14.1@3509,3026.68 v2@3509,3076
  Bottom Layer w10: v2@3509,3073 3550.24,3073 3567,3056.24 3567,2970.73 3687.73,2850 SD1.CD/DAT3@3694.64,2850
  other v2: 3509,3070
SDC: R15.2 U3.53 | length 79.9
  Top Layer w10: R15.2@3479,2987.31 3479,2964 3483.9,2959.1 U3.53
SPI1_MISO: SPI1.3 U3.22 | length 218.3
  Top Layer w10: U3.22 3365.79,2420.21 v2@3405.5,2380.5
  Bottom Layer w10: SPI1.3@3379,2491.02 3388,2482.02 3388,2397 v2@3405,2380
  other v2: 3401,2381
SPI1_MOSI: SPI1.2 U3.23 | length 237.3
  Top Layer w10: U3.23 3385.47,2427.87 3401.34,2412 3415,2412 v2@3444,2383
  Bottom Layer w10: v2@3448,2383 3439,2383 3418,2404 3418,2457 3432.02,2471.02 SPI1.2@3448,2471.02
  other v2: 3440,2383
SPI1_NSS: SPI1.5 U3.20 | length 244.6
  Top Layer w10: v2@3324,2363 3326.42,2365.42 U3.20
  Bottom Layer w10: SPI1.5@3280.79,2488.02 3280.79,2485.21 3326,2440 3326,2365 v2@3323,2362
  other v2: 3324.42,2370.42
SPI1_SCK: SPI1.4 U3.21 | length 202.6
  Top Layer w10: U3.21 3346.1,2398.9 v2(3361,2384)
  Bottom Layer w10: SPI1.4@3330,2491.02 3330,2487 3361,2456 v2(3361,2384)
SPI2_MISO: SPI2.3 U3.35 | length 267
  Top Layer w10: U3.35 3767.27,2576.73 3778,2566 3790,2566 3808,2548 v2@3813,2548
  Bottom Layer w10: v2@3813.5,2548.5 3864.21,2497.79 SPI2.3
  other v2: 3812,2547
SPI2_MOSI: SPI2.2 U3.36 | length 310.6
  Top Layer w10: U3.36 v2(3788,2596.42)
  Bottom Layer w10: v2(3788,2596.42) 3809.67,2574.75 3824.25,2574.75 3864,2535 3880,2535 3908,2507 SPI2.2@3908,2502
SPI2_NSS: SPI2.5 U3.33 | length 152.8
  Top Layer w10: U3.33 3702.64,2537.36 3711,2529 v2(3734,2529)
  Bottom Layer w10: v2(3734,2529) 3735,2529 3765.79,2498.21 SPI2.5
SPI2_SCK: SPI2.4 U3.34 | length 214.5
  Top Layer w10: U3.34 3756.95,2557.05 3775,2539 v2@3783,2539
  Bottom Layer w10: v2@3784,2538 3784,2527 3785.39,2525.61 3786.51,2525.61 3815,2497.11 SPI2.4
  other v2: 3773,2537
U_N: R6.1 U3.44 | length 233.4
  Top Layer w10: U3.44 3672.13,2753.9 3679.03,2747 v2(3754,2747)
  Bottom Layer w10: v2@3760,2757 3789,2786 3801,2786 3831,2816 3847.27,2816 R6.1@3850.27,2819
U_P: R7.1 U3.45 | length 243.5
  Top Layer w10: U3.45 3676.48,2773.58 3685.07,2765 3732.76,2765 3742.51,2774.75 3782.25,2774.75 v2(3800,2757)
  Bottom Layer w10: v2@3799.88,2750.57 3799.88,2757.88 3827,2785 R7.1
UART2_RX: U3.17 UART2.2 | length 281.1
  Top Layer w10: v2(3143,2468) 3162.17,2487.17 3258.83,2487.17 3267.36,2478.64 U3.17
  Bottom Layer w10: UART2.2 3065.76,2500 3096.76,2469 3134.59,2469 v2@3143,2460.59
UART2_TX: R5.2 UART2.3 | length 121.4
  Top Layer w10: v2@3110,2510 R5.2
  Bottom Layer w10: UART2.3@3052.79,2555.21 3052.79,2540.21 3092,2501 3106,2501 v2(3110,2497)
UART2_TXR: R5.1 U3.16 | length 32.6
  Top Layer w10: R5.1@3178,2510 3178,2513 3190.59,2525.59 U3.16
UART3_RX: U2.5 U3.30 | length 628.4
  Top Layer w10: U3.30 3523.27,2423.52 3564.78,2382 3714,2382 3870,2538 3870,2644 3896,2670 U2.5@3916,2670
UART3_TX: R9.2 U1.5 | length 449.9
  Top Layer w10: R9.2 3516.27,2357 3771.28,2357 3884.28,2470 U1.5@3902,2470
UART3_TXR: R9.1 U3.29 | length 57.4
  Top Layer w10: R9.1@3503.58,2403.15 U3.29
USB_N: R6.2 USB.2 | length 67.2
  Bottom Layer w10: R6.2@3883.73,2816.5 USB.2
USB_P: R7.2 USB.3 | length 72.9
  Bottom Layer w10: R7.2@3878.48,2784 3949.94,2784 USB.3
VCAP1: C7.2 U3.31 | length 84.2
  Top Layer w10: U3.31 3542.95,2427.87 3557.82,2413 C7.2
VCAP2: C6.2 U3.47 | length 54.8
  Top Layer w10: U3.47 3690.05,2812.95 C6.2@3693,2810
VIN: C17.2 D5.2 U4.1 U4.3 VIN.3 | length 342.4
  Top Layer w10: U4.3 v1@4082.8,3141.8
  Top Layer w20: U4.1 4120,3067 4139,3048 D5.2@4139,3022.26
  Bottom Layer w10: v1(4090,3142) 4120,3112 4120,3089 ; v1@4107,3067 4107,3076 4120,3089 ; v1@4120,3067 4120,3089
  Bottom Layer w30: VIN.3@4082.21,3064.87 4084.35,3067 4120,3067 v1(4138,3049)
  other v1: 4116,3067
pads on no net: SD1.CD U3.2 U3.3 U3.4 U3.8 U3.9 U3.10 U3.11 U3.14 U3.15 U3.24 U3.25 U3.26 U3.27 U3.28 U3.37 U3.38 U3.41 U3.43 U3.57 USB.4 USB.MH1 USB.MH2

## Polygon pours and split planes (outlines as drawn)
+3.3V on Top Layer "RFGND" (solid, pour order 2): 3542.95,2460.59 3568,2461 3568,2517 3557,2528 3557,2738 3571,2752 3615,2752 3639.41,2773.58 3639.41,2812.95 3603,2832.64 3603,2851 3625,2873 3625,2940 3607,2958 3587,2938 3587,2883 3576,2872 3541,2872 3503.58,2909.41 3306.73,2909.41 3267.36,2873 3227,2873 3227,2832.64 3190.59,2793.27 3190.59,2557.05 3287.05,2460.59
GND on Top Layer "GND" (solid, pour order 1000): 2848,3249 4240,3249 4240,2293 2848,2293
GND on Bottom Layer "CriticalGND" (solid, remove dead copper, pour order 1001): 2848,3249 4240,3249 4240,2302 4240,2293 2848,2293
GND on Bottom Layer "Bottom Layer-No Net" (solid, shelved, pour order 2): 2805,3195 4420,3195 4420,2280 2805,2280

## Keep-outs
Keep-Out Layer:
  the board outline again, w18

## Other copper
Bottom Layer:
  region net GND: 3516,2648 3516,2782 3368,2782 3368,2648
  rectangle net GND: 3073,2571.96 3092.55,2593

## Silkscreen, mask and mechanical layers (free items; w line width, h text height)
Top Overlay:
  text "3V" at 3698,3186 h40
  text "0" at 3831,3186 h40
  text "CK" at 3553,3185 h40
  text "IO" at 3420,3182 h40
  text "SWD" at 3705,3043 h60
Bottom Overlay:
  lines w10: 3248,2543 3248,2527 ; 3264,2527 3248,2527 ; 3325,2543 3264,2543 3248,2527
  text "USB" at 3970,3135 h30
  text "GND" at 3901,3008 h25
  text "5V" at 4213,3007 h25
  text "3V3" at 4091,2992 h25
  text "RST" at 3489,2544 h40

## Dimensions
3453,3147 to 3584,3147 on Mechanical 1
4240,3249 to 2848,3249 on Mechanical 1
4240,2293 to 4240,3249 on Mechanical 1

## Text inside footprints (layer, text, board x,y; h text height)
USB: Mechanical 1 "PCB Edge" at 4277.02,2943.91 h9.84 r90